# Altium PCB CH572Q-DG-R0-1v1.PcbDoc
Units mil, origin at the board's own origin, x right, y up, seen from the top; angles counter-clockwise.
Board outline 452.76 x 645.67 mil, 2 copper layers (Top Layer, Bottom Layer); 10 components, 12 nets, 37 pads, 46 vias.
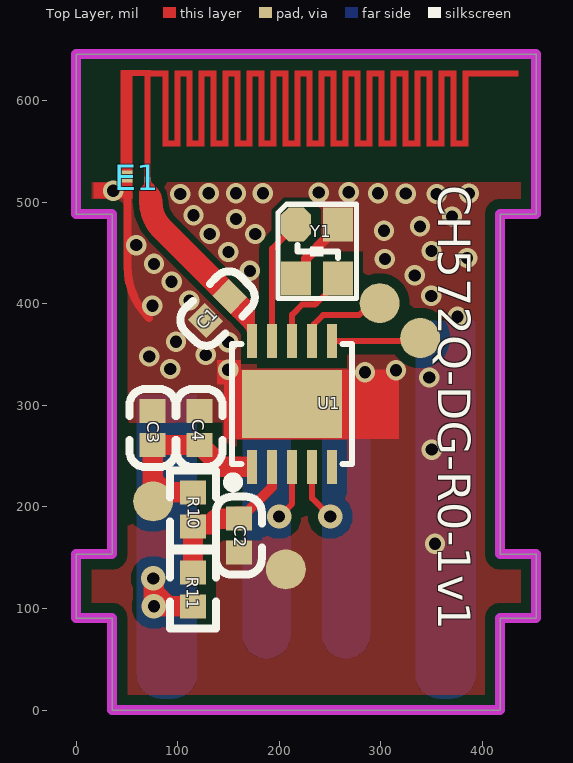
[diagram p0: Top Layer view]
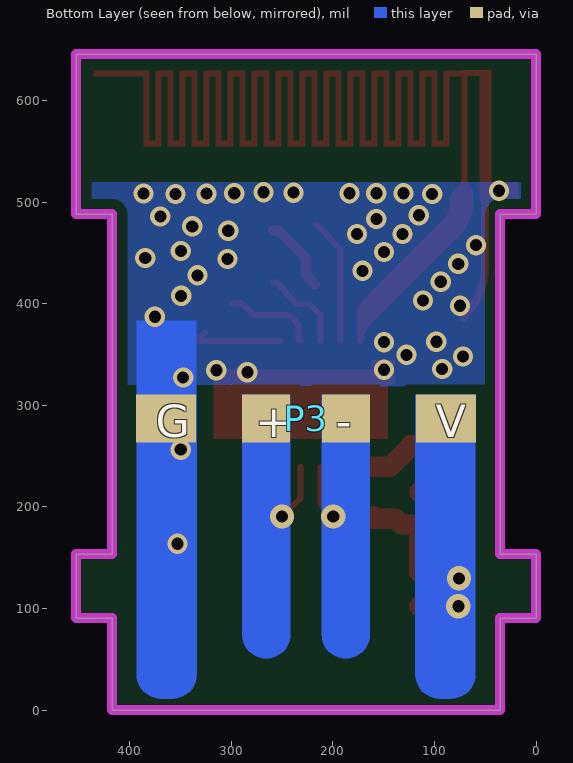
[diagram p1: Bottom Layer view, seen from below]

## Layer stack, top to bottom
Top Solder: solder mask 0.4, Solder Resist, Dk 3.5
Top Layer: signal copper 1.4
Dielectric 1: dielectric 12.6, FR-4, Dk 4.8
Bottom Layer: signal copper 1.4
Bottom Solder: solder mask 0.4, Solder Resist, Dk 3.5

## Board outline
0,90.55 35.43,90.55 35.43,0 417.32,0 417.32,90.55 452.76,90.55 452.76,153.54 417.32,153.54 417.32,488.19 452.76,488.19 452.76,645.67 0,645.67 0,488.19 35.43,488.19 35.43,153.54 0,153.54

## Design rules (kind name [scope] priority, off if disabled: settings)
Clearance Clearance_2 [InNet('ANT') vs InPolygon] p1: gap=6 ignorepadtopadclearanceinfootprint=FALSE
Clearance Clearance_1 [InPolygon] p2: gap=10 ignorepadtopadclearanceinfootprint=FALSE
Clearance [All] p3: gap=6 ignorepadtopadclearanceinfootprint=FALSE except(8: Arc-Via Track-Via SMDPad-Via THPad-Via Via-Via Via-Fill Via-Poly Via-Region Via-Hole)
ComponentClearance [All] p1 off: gap=10 collisioncheckmode=3 verticalgap=10 showdistances=FALSE
DiffPairsRouting [All] p1: maxlimit=10 minlimit=7 mostfreqgap=8 toplayer_minwidth=6 toplayer_maxwidth=15 toplayer_prefwidth=8 bottomlayer_minwidth=6 bottomlayer_maxwidth=15 bottomlayer_prefwidth=8 maxuncoupledlength=500
MinimumSolderMaskSliver [All] p1 off: minsoldermaskwidth=10
PolygonConnect [All] p1: connectstyle=Direct reliefconductorwidth=20 reliefentries=4 polygonreliefangle="90 Angle" airgapwidth=10
RoutingVias [All] p1: holewidth=16 width=28 viastyle="Through Hole" minholewidth=12 minwidth=20 maxholewidth=28 maxwidth=50
SilkToSilkClearance [All] p1 off: silktosilkclearance=10
SilkToSolderMaskClearance [IsPad] p1 off: minsilkscreentomaskgap=10 clearancetoexposedcopper=TRUE
SolderMaskExpansion [All] p1: expansion=2 istentingtop=FALSE
Width [All] p1: maxlimit=100 minlimit=5 preferedwidth=10
25 further rules are at their usual default settings.

## Components (designator, comment, footprint, x,y, rotation, side; value= is the part's Value field where it differs from the comment)
C1 "NC" 0402_C#1 151.04,407.13 r315 top
C2 "2.2uF" 0402_C#2 160.15,188.47 r0 top
C3 "2.2uF" 0402_C#2 75.13,260.96 r180 top
C4 "0.1uF" 0402_C#2 121.36,260.96 r180 top
E1 "ANTENNA" ANT-F-1-2.4G-0.8mmFR4 70.45,522.54 r0 top
P3 "USB" USBAM-4P 226.38,287.22 r180 bottom
R10 "1.5K" 0402 114.94,214.33 r270 top
R11 "10R" 0402 114.94,135.58 r270 top
U1 "CH572Q" DFN10_3X3 212.46,301.22 r0 top
Y1 "32MHz" XT2016 216.6,478.18 r270 top

## Footprints (in the part's own frame and the unit in brackets; to place one, negate y for a bottom-side part, rotate by r counter-clockwise, add the part's x,y. Pads: shape width x height; smd on the part's side, far side on the other; paste and mask are expansions set on the pad)
0402 [mm]
  rect 0.6x0.65 smd mask+0.051: 1(0,0) 2(0.85,0)
  silkscreen extent -0.55,-0.58 1.4,0.57
0402_C#1 [mm]
  rect 0.65x0.582 smd mask+0.051: 1(0,0)
  rect 0.65x0.6 smd mask+0.051: 2(0,-0.85)
  silkscreen extent -0.58,-1.4 0.57,0.55
0402_C#2 [mm]
  rect 0.65x0.6 smd mask+0.051: 1(0,0) 2(0,-0.85)
  silkscreen extent -0.58,-1.4 0.57,0.55
ANT-F-1-2.4G-0.8mmFR4 [mm]
  rect 0.3x0.3 smd mask+0: 0(-0.525,0.075)
  rect 0.15x0.15 smd mask+0: 1(0,0)
  Top Layer region: 7.875,0.825 8.025,0.825 8.025,2.725 7.875,2.725
  Top Layer region: 7.875,2.575 9.275,2.575 9.275,2.725 7.875,2.725
  Top Layer region: 7.575,0.825 8.025,0.825 8.025,0.975 7.575,0.975
  Top Layer region: 6.675,0.825 6.825,0.825 6.825,2.725 6.675,2.725
  Top Layer region: 6.975,0.825 7.125,0.825 7.125,2.725 6.975,2.725
  Top Layer region: 7.275,0.825 7.425,0.825 7.425,2.725 7.275,2.725
  Top Layer region: 7.575,0.825 7.725,0.825 7.725,2.725 7.575,2.725
  Top Layer region: 6.675,2.575 7.125,2.575 7.125,2.725 6.675,2.725
  Top Layer region: 7.275,2.575 7.725,2.575 7.725,2.725 7.275,2.725
  Top Layer region: 6.375,0.825 6.825,0.825 6.825,0.975 6.375,0.975
  Top Layer region: 6.975,0.825 7.425,0.825 7.425,0.975 6.975,0.975
  Top Layer region: 5.475,0.825 5.625,0.825 5.625,2.725 5.475,2.725
  Top Layer region: 5.775,0.825 5.925,0.825 5.925,2.725 5.775,2.725
  Top Layer region: 6.075,0.825 6.225,0.825 6.225,2.725 6.075,2.725
  Top Layer region: 6.375,0.825 6.525,0.825 6.525,2.725 6.375,2.725
  Top Layer region: 5.475,2.575 5.925,2.575 5.925,2.725 5.475,2.725
  Top Layer region: 6.075,2.575 6.525,2.575 6.525,2.725 6.075,2.725
  Top Layer region: 5.175,0.825 5.625,0.825 5.625,0.975 5.175,0.975
  Top Layer region: 5.775,0.825 6.225,0.825 6.225,0.975 5.775,0.975
  Top Layer region: 4.275,0.825 4.425,0.825 4.425,2.725 4.275,2.725
  Top Layer region: 4.575,0.825 4.725,0.825 4.725,2.725 4.575,2.725
  Top Layer region: 4.875,0.825 5.025,0.825 5.025,2.725 4.875,2.725
  Top Layer region: 5.175,0.825 5.325,0.825 5.325,2.725 5.175,2.725
  Top Layer region: 4.275,2.575 4.725,2.575 4.725,2.725 4.275,2.725
  Top Layer region: 4.875,2.575 5.325,2.575 5.325,2.725 4.875,2.725
  Top Layer region: 3.975,0.825 4.425,0.825 4.425,0.975 3.975,0.975
  Top Layer region: 4.575,0.825 5.025,0.825 5.025,0.975 4.575,0.975
  Top Layer region: 3.075,0.825 3.225,0.825 3.225,2.725 3.075,2.725
  Top Layer region: 3.375,0.825 3.525,0.825 3.525,2.725 3.375,2.725
  Top Layer region: 3.675,0.825 3.825,0.825 3.825,2.725 3.675,2.725
  Top Layer region: 3.975,0.825 4.125,0.825 4.125,2.725 3.975,2.725
  Top Layer region: 3.075,2.575 3.525,2.575 3.525,2.725 3.075,2.725
  Top Layer region: 3.675,2.575 4.125,2.575 4.125,2.725 3.675,2.725
  Top Layer region: 2.775,0.825 3.225,0.825 3.225,0.975 2.775,0.975
  Top Layer region: 3.375,0.825 3.825,0.825 3.825,0.975 3.375,0.975
  Top Layer region: 1.875,0.825 2.025,0.825 2.025,2.725 1.875,2.725
  Top Layer region: 2.175,0.825 2.325,0.825 2.325,2.725 2.175,2.725
  Top Layer region: 2.475,0.825 2.625,0.825 2.625,2.725 2.475,2.725
  Top Layer region: 2.775,0.825 2.925,0.825 2.925,2.725 2.775,2.725
  Top Layer region: 1.875,2.575 2.325,2.575 2.325,2.725 1.875,2.725
  Top Layer region: 2.475,2.575 2.925,2.575 2.925,2.725 2.475,2.725
  Top Layer region: 1.575,0.825 2.025,0.825 2.025,0.975 1.575,0.975
  Top Layer region: 2.175,0.825 2.625,0.825 2.625,0.975 2.175,0.975
  Top Layer region: 0.975,0.825 1.425,0.825 1.425,0.975 0.975,0.975
  Top Layer region: 0.375,0.825 0.825,0.825 0.825,0.975 0.375,0.975
  Top Layer region: 1.275,2.575 1.725,2.575 1.725,2.725 1.275,2.725
  Top Layer region: 0.675,2.575 1.125,2.575 1.125,2.725 0.675,2.725
  Top Layer region: 0.075,2.575 0.525,2.575 0.525,2.725 0.075,2.725
  Top Layer region: 1.575,0.825 1.725,0.825 1.725,2.725 1.575,2.725
  Top Layer region: 1.275,0.825 1.425,0.825 1.425,2.725 1.275,2.725
  Top Layer region: 0.975,0.825 1.125,0.825 1.125,2.725 0.975,2.725
  Top Layer region: 0.675,0.825 0.825,0.825 0.825,2.725 0.675,2.725
  Top Layer region: 0.375,0.825 0.525,0.825 0.525,2.725 0.375,2.725
  Top Layer region: 0.075,2.576 0.075,2.726 -0.675,2.726 -0.675,2.576
  Top Layer region: -0.075,-0.075 0.075,-0.075 0.075,2.725 -0.075,2.725
  Top Layer region: -0.675,-0.075 -0.375,-0.075 -0.375,2.725 -0.675,2.725
DFN10_3X3 [mm]
  rect 2.5x1.7 smd mask+0.051: 0(0,0)
  rect 0.25x0.85 smd mask+0.051: 1(-1,-1.575) 2(-0.5,-1.575) 3(0,-1.575) 4(0.5,-1.575) 5(1,-1.575) 6(1,1.575) 7(0.5,1.575) 8(0,1.575) 9(-0.5,1.575) 10(-1,1.575)
  silkscreen extent -1.57,-2.05 1.5,1.5
USBAM-4P [mm]
  rect 1.5x1.2 smd: 1(3.5,0) 4(-3.5,0)
  rect 1.2x1.2 smd: 2(1,0) 3(-1,0)
  Top Layer region: -0.998,-6.006 -1.227,-5.959 -1.422,-5.829 -1.551,-5.634 -1.596,-5.404 -1.596,-5.404 -1.596,-5.404 -1.596,0.594 -0.396,0.594 -0.396,-5.404 -0.396,-5.404 -0.441,-5.634 -0.571,-5.829 -0.765,-5.959 -0.995,-6.006
  Top Layer region: -3.639,-7.006 -3.868,-6.959 -4.062,-6.829 -4.192,-6.634 -4.237,-6.404 -4.237,-6.404 -4.237,-6.404 -4.237,0.594 -2.737,0.594 -2.737,-6.404 -2.737,-6.404 -2.782,-6.634 -2.911,-6.829 -3.106,-6.959 -3.335,-7.006 -3.335,-7.006
  Top Layer region: 0.989,-6.006 0.759,-5.959 0.565,-5.829 0.436,-5.634 0.39,-5.404 0.39,-5.404 0.39,-5.404 0.39,0.594 1.591,0.594 1.591,-5.404 1.591,-5.404 1.546,-5.634 1.416,-5.829 1.222,-5.959 0.992,-6.006
  Top Layer region: 3.331,-7.006 3.102,-6.959 2.907,-6.829 2.778,-6.634 2.733,-6.404 2.733,-6.404 2.733,-6.404 2.733,0.594 4.233,0.594 4.233,-6.404 4.233,-6.404 4.188,-6.634 4.058,-6.829 3.864,-6.959 3.634,-7.006 3.634,-7.006
XT2016 [mm]
  oct 0.85x0.75 smd mask+0.051: 1(0,0)
  rect 0.85x0.75 smd mask+0.051: 2(1.35,0) 3(1.35,1.05) 4(0,1.05)
  silkscreen extent -0.5,-0.45 1.85,1.5

## Part data
C1 C2 C3 C4: library part CAP, "Capacitor"
E1: "Generic Antenna"
R10 R11: library part RES2
U1: "RISC-V MCU with BLE/2.4GHz Wireless/USB/UART/I2C/PWM/CMP"
Y1: library part 晶体

## Free pads (board coordinates)
  round 39.37 smd mask+2: 1(75.73,205.47) 1(206.4,138.56) 1(298.69,400.51) 1(338.57,366.25)

## Via types
v1: diameter 20, hole 12, Top Layer to Bottom Layer, tented both sides, 42 vias
v2: diameter 24, hole 12, Top Layer to Bottom Layer, tented both sides, 4 vias

## Nets (pads, with @x,y where several pads share a name; then routed paths per layer and width w, separated by ;. In a path a pad name is that pad's centre, name@x,y a point inside that pad or via, vN(x,y) a via of type N, cw(c..) or ccw(c..) an arc to the next point about the centre after c; other vN are vias at no path point)
+5V: P3.1 R11.2 | length 91.9
  Top Layer w20: v2@75.51,130.1 v2(75.9,129.71) 76.21,129.41 76.21,116.02 ; 95.73,102.22 90.01,102.22 ; R11.2 114.84,102.22 90.01,102.22 ; 76.21,116.02 76.21,102.63 v2(76.52,102.32) 76.62,102.22 90.01,102.22 ; 76.21,116.02 90.01,102.22
ANT: C1.1 E1.1 U1.10 | length 316.6
  Top Layer w6: 64.91,500 64.91,508.4 cw(c71.73,508.4) 66.91,513.22 ccw(c58.36,521.77) 70.45,521.77 E1.1 ccw(c79.02,522.54) 72.95,516.49 ; 70.67,507.99 70.67,510.97 cw(c78.48,510.97) 72.95,516.49 ; 81.74,501.14 ccw(c65.9,501.14) 77.1,512.34 72.96,516.49 ; 156.52,389.59 166.17,379.94 cw(c149.46,363.23) U1.10 U1.10@173.09,365.45 ; 163.33,389.03 cw(c139.75,365.45) U1.10@173.09,365.45 ; 165.78,392.43 cw(c148.12,374.77) U1.10@173.09,374.77 ; 168.19,402.04 cw(c156.35,390.21) 173.09,390.21 U1.10@173.09,374.77 ; U1.10@173.09,365.45 U1.10@173.09,374.77
  Top Layer w22.9: 73.33,500.84 ccw(c111.87,500.84) 84.62,473.59 162.4,395.81
GND: C1.2 C2.2 C3.2 C4.2 E1.0 P3.4 pad.1@206.4,138.56 U1.0 Y1.2 Y1.4 | length 218.8
  Top Layer w8: E1.0@48.12,523.59 E1.0 ; E1.0@50.43,523.59 50.43,437.05 ccw(c122.42,437.05) 71.52,386.15
  Top Layer w10: Y1.2@217.6,419.03 226.37,427.79 226.37,444.49 248.18,466.3 248.18,466.45 253.91,472.18 Y1.4@258.94,472.18
  other v1: 353.1,163.88 349.9,256.42 347.52,327.46 284.24,332.63 314.77,334.6 149.75,335.07 92.55,335.78 71.94,348.15 127.59,349.69 98.22,362.58 149.75,362.23 375.25,387.21 75.03,398.13 111.41,403.13 349.44,407.74 93.93,421.6 333.27,427.95 170.99,432.35 76.64,439.27 303.84,444.05 384.79,445.03 149.79,450.94 349.67,451.89 59.2,457.74 131.57,468.64 176.32,468.64 303.01,471.79 338.47,476.2 157.3,483.5 369.89,485.97 115.43,487.21 102.42,508.03 324.48,508.39 354.95,508.01 386.56,508.58 130.53,508.72 157.25,508.72 183.79,508.72 238.8,509.42 297.07,508.77 268.29,509.76 36.53,511.23
PA0: P3.2 U1.3 | length 53.9
  Top Layer w6: v2(199.71,190.58) 212.46,203.32 U1.3
PA1: P3.3 U1.4 | length 56.1
  Top Layer w6: U1.4 232.15,208.59 v2(250.16,190.58)
PA2: pad.1@338.57,366.25 U1.6 | length 97.8
  Top Layer w6: U1.6 pad.1@338.57,363.23 ; pad.1@326.04,371.27 pad.1@334.57,364.25
PA3: pad.1@298.69,400.51 U1.7 | length 90.6
  Top Layer w6: U1.7 234.07,365.15 234.07,379.85 243.18,388.96 278.49,388.96 290.04,400.51 pad.1@298.69,400.51
PA7: U1.5
V5: C2.1 R10.2 R11.1 U1.2 | length 161.3
  Top Layer w10: C2.1@155.74,193.08 157.94,195.28 168.54,195.28 192.7,219.43 192.7,239.14 U1.2
  Top Layer w20: R11.1 R10.2 116.75,182.68 132.32,182.68 138.11,188.47 C2.1
VCC: C3.1 C4.1 pad.1@75.73,205.47 R10.1 U1.1 | length 221.8
  Top Layer w10: C4.1@122.09,259.69 122.85,260.46 C4.1@123.36,260.96
  Top Layer w20: C3.1@75.13,259.15 76.33,260.36 C3.1@76.63,260.36 ; 75.43,231.3 75.43,226.19 ; C3.1@76.13,259.66 C3.1@76.83,260.36 ; C3.1@77.75,260.36 C3.1@76.83,260.36 ; pad.1@84.12,217.5 75.43,226.19 ; R10.1 89.83,214.33 80.97,205.47 75.73,205.47 75.43,205.77 75.43,226.19 ; C4.1@123.36,260.96 C4.1@122.35,260.96 ; 166.78,239.53 143.78,239.53 122.85,260.46 C4.1@122.35,260.96 ; 75.43,226.19 75.43,259.15 C3.1@76.63,260.36 ; C3.1@76.63,260.36 C3.1@76.83,260.36 ; C3.1@76.83,260.36 77.43,260.96 C4.1 C4.1@122.35,260.96
X32MI: U1.9 Y1.1 | length 124.8
  Top Layer w6: U1.9 192.78,454.35 Y1.1
X32MO: U1.8 Y1.3 | length 86.4
  Top Layer w6: U1.8 212.46,389.29 222.47,399.3 235.1,399.3 236.25,400.45 236.54,400.45 246.18,410.09 246.18,411.3 255.91,421.03 Y1.3@258.94,421.03

## Polygon pours and split planes (outlines as drawn)
GND on Bottom Layer "GND" (solid, remove dead copper, pour order 2): -0.26,645.63 -0.26,0 452.76,0 452.76,645.67
GND on Top Layer "GND" (solid, remove dead copper, pour order 0): -0.26,645.63 -0.26,0 452.76,0 452.76,645.67

## Keep-outs
Keep-Out Layer:
  the board outline again, w10

## Other copper
Top Layer:
  rectangle net GND: 145.59,266.96 317.51,335.35
  rectangle net GND: 138.82,320.67 162.17,344.69
  rectangle net GND: 17.18,503.7 55.69,519.59
Bottom Layer:
  rectangle net GND: 334.12,296.22 393.19,383.76
  pour cut-out: 34.43,318.42 34.43,-0.5 417.97,-0.5 417.97,320.24
Multi-Layer:
  pour cut-out: 452.76,645.67 452.76,519.59 0,519.59 0,645.67

## Silkscreen, mask and mechanical layers (free items; w line width, h text height)
Top Overlay:
  text "CH572Q-DG-R0-1v1" at 356.15,516.67 h32 r270
Mechanical 1:
  the board outline again, w10

## Text inside footprints (layer, text, board x,y; h text height)
P3: Bottom Overlay "G" at 374.41,268.56 h32; Bottom Overlay "+" at 276.38,268.56 h32; Bottom Overlay "-" at 197.02,268.56 h32; Bottom Overlay "V" at 98.78,268.56 h32